# EAGLE board T02_noclock_rev3 (EAGLE 7.1.0)
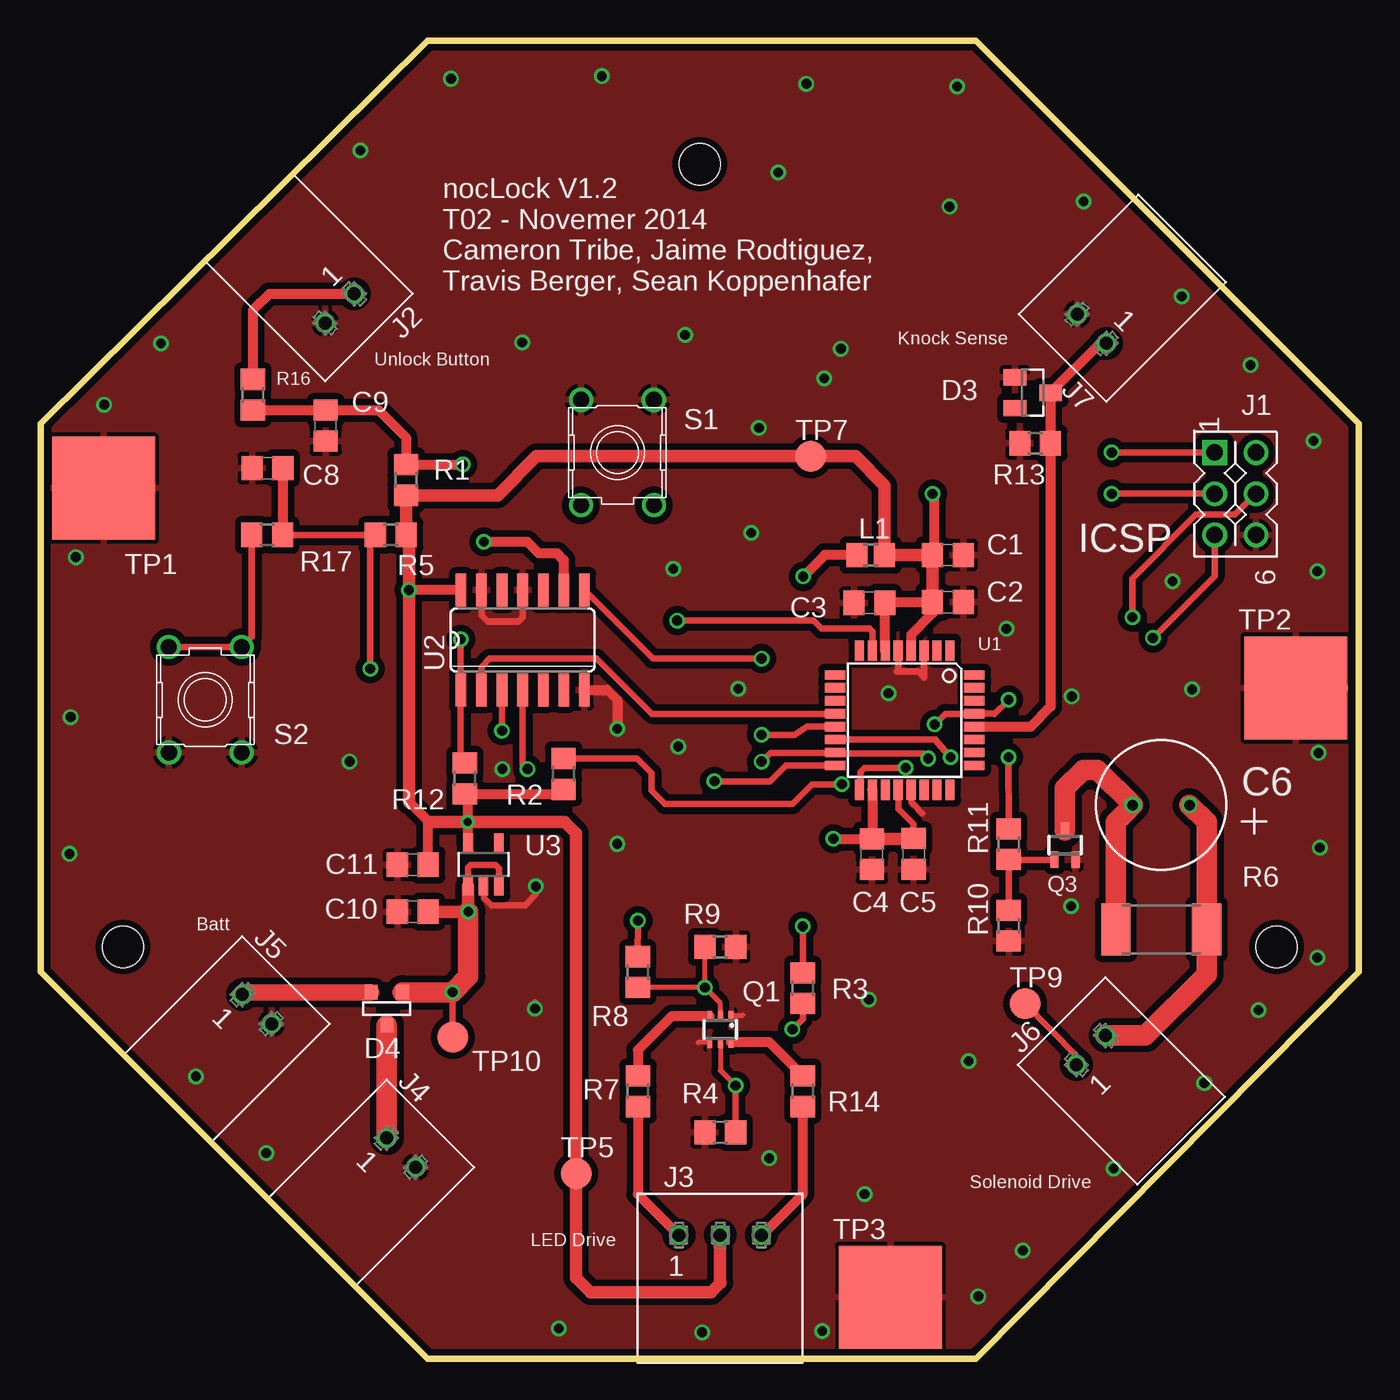
[diagram p0: board, top side]
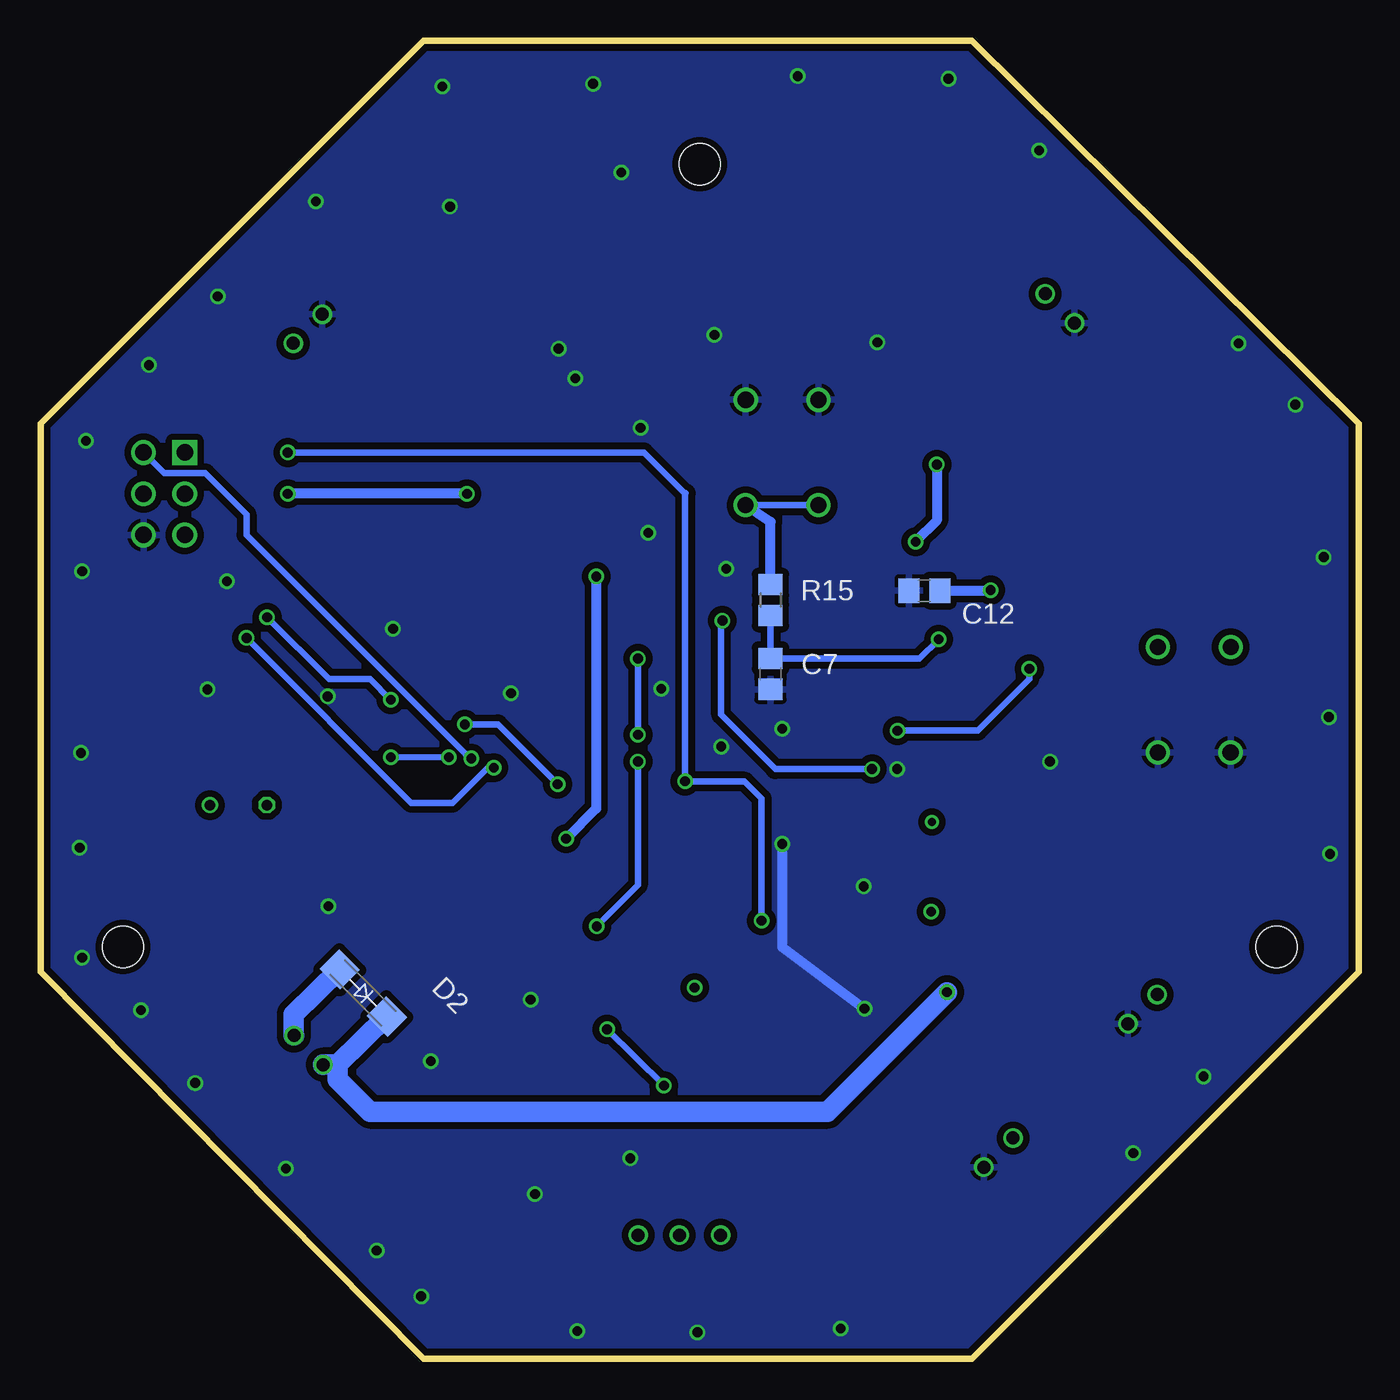
[diagram p1: board, bottom side, seen from below]

Size 81.28 x 81.28 mm. Coordinates in mm from the lower left corner, seen from the top.
Outline: 0,23.88 0,57.66 23.88,81.28 57.66,81.28 81.28,57.66 81.28,23.88 57.66,0 23.88,0 0,23.88
Copper layers (1*16): Top 0.0356mm / dielectric 1.5011mm / Bottom 0.0356mm
Design rules "OSH-Park-2-layer": minimum track width 6mil, minimum drill 13mil, track to track 6mil, track to pad 6mil, pad to pad 6mil, via to via 6mil, smd to smd 6mil, copper to edge 15mil, drill to drill 6mil, minimum pad ring 7mil, minimum via ring 7mil, stop-mask expansion 3mil, vias tented up to drill 0mil, thermal gap 10mil
Holes 2.54 mm at 76.2,25.4 5.08,25.4 40.64,73.66

## Footprints (pad centres in the part's own frame; a part is rotated, then mirrored left to right if it is on the bottom)
C0805 = smd 1.3 x 1.5: 1 -0.95,0; 2 0.95,0
EKY-100ELL102MH20D = drill 0.65: + -1.75,0 | drill 0.65 octagon: - 1.75,0
SMA-DO214AC = smd 1.8 x 1.7: A -2.05,0; K 2.05,0
SOT23 = smd 1 x 1.4: 1 -0.95,-1.1; 2 0.95,-1.1; 3 0,1.1
SOT-23 = smd 0.787 x 0.889: 1 -0.94,1.016; 2 0.991,1.016; 3 0.025,-1.016
ICSP = drill 1.016 square: 1 -5.08,1.27 | drill 1.016: 2 -2.54,1.27; 3 0,1.27; 4 -5.08,3.81; 5 -2.54,3.81; 6 0,3.81
2-PIN_CONNECTOR = drill 0.8: 1 -1.27,0; 2 1.27,0
3_PIN_CONNECTOR = drill 0.8: 1 -2.54,0; 2 0,0; 3 2.54,0
R0805 = smd 1.3 x 1.5: 1 -0.85,0; 2 0.85,0
SOT363 = smd 0.3 x 0.7: D1 -0.62,-0.8; D2 -1.92,0.8; G1 -1.27,0.8; G2 -1.27,-0.8; S1 -0.62,0.8; S2 -1.92,-0.8
SOT323 = smd 0.5 x 1: 1 0,0.9; 2 -0.65,-0.9; 3 0.65,-0.9
R0805' = smd 1.3 x 1.5: 1 -0.95,0; 2 0.95,0
R2512 = smd 1.8 x 3.2: 1 -2.8,0; 2 2.8,0
FSM14JH = drill 1: 1 -3.25,2.25 | drill 0.99: 2 -3.25,-2.25; 3 3.25,2.25; 4 3.25,-2.25
TP100SQ = smd 6.35 x 6.35: P$1 0,0
TP19R = smd 1.9 x 1.9: TP 0,0
TQFP32 = smd 1.27 x 0.559: 1 -4.293,2.8; 2 -4.293,2; 3 -4.293,1.2; 4 -4.293,0.4; 5 -4.293,-0.4; 6 -4.293,-1.2; 7 -4.293,-2; 8 -4.293,-2.8; 17 4.293,-2.8; 18 4.293,-2; 19 4.293,-1.2; 20 4.293,-0.4; 21 4.293,0.4; 22 4.293,1.2; 23 4.293,2; 24 4.293,2.8 | smd 0.559 x 1.27: 9 -2.8,-4.293; 10 -2,-4.293; 11 -1.2,-4.293; 12 -0.4,-4.293; 13 0.4,-4.293; 14 1.2,-4.293; 15 2,-4.293; 16 2.8,-4.293; 25 2.8,4.293; 26 2,4.293; 27 1.2,4.293; 28 0.4,4.293; 29 -0.4,4.293; 30 -1.2,4.293; 31 -2,4.293; 32 -2.8,4.293
SO14 = smd 0.66 x 2.032: 1 -3.81,-3.073; 2 -2.54,-3.073; 3 -1.27,-3.073; 4 0,-3.073; 5 1.27,-3.073; 6 2.54,-3.073; 7 3.81,-3.073; 8 3.81,3.073; 9 2.54,3.073; 10 1.27,3.073; 11 0,3.073; 12 -1.27,3.073; 13 -2.54,3.073; 14 -3.81,3.073
SOT23-5 = smd 0.6 x 1.2: 1 -0.95,-1.306; 2 0,-1.306; 3 0.95,-1.306; 4 0.95,1.306; 5 -0.95,1.306

## Placement (x,y rotation side)
C1  4.7uF  [C0805]  55.94,49.56 0 top
C2  0.1uF  [C0805]  55.94,46.66 0 top
C3  0.1uF  [C0805]  51.1,46.61 180 top
C4  0.1uF  [C0805]  51.25,31.12 270 top
C5  4.7uF  [C0805]  53.83,31.13 270 top
C6  1000uF  [EKY-100ELL102MH20D]  69.08,34.15 180 top
C7  1uF  [C0805]  36.28,42.24 270 bottom
C8  1uF  [C0805]  13.99,54.92 180 top
C9  1uF  [C0805]  17.57,57.54 270 top
C10  1uF  [C0805]  22.95,27.57 180 top
C11  1uF  [C0805]  22.95,30.46 180 top
C12  1uF  [C0805]  26.79,47.36 180 bottom
D2  GF1  [SMA-DO214AC]  61.38,22.56 315 bottom
D3  5.1V  [SOT23]  61.17,59.57 270 top
D4  PMEG2005CT,215  [SOT-23]  21.32,21.59 0 top
J1  ICSP  [ICSP]  71.12,50.8 270 top
J2  640455-2  [2-PIN_CONNECTOR]  18.44,64.77 225 top
J3  5BC-3-CA-F  [3_PIN_CONNECTOR]  41.9,7.63 0 top
J4  640455-2  [2-PIN_CONNECTOR]  22.23,12.73 315 top
J5  640455-2  [2-PIN_CONNECTOR]  13.34,21.56 315 top
J6  640455-2  [2-PIN_CONNECTOR]  64.76,19.04 45 top
J7  640455-2  [2-PIN_CONNECTOR]  64.81,63.51 135 top
L1  CE201210-10NJ  [R0805]  51.18,49.56 0 top
Q1  DMN63D8LDW-7  [SOT363]  40.64,20.32 180 top
Q3  DMG1012UW-7  [SOT323]  63.16,31.68 0 top
R1  10K  [R0805']  22.53,54.19 90 top
R2  10K  [R0805']  32.24,36.07 90 top
R3  1k  [R0805']  46.99,22.86 90 top
R4  10K  [R0805']  41.91,13.97 0 top
R5  10k  [R0805']  21.59,50.8 180 top
R6  10  [R2512]  69.09,26.49 0 top
R7  330  [R0805']  36.83,16.51 270 top
R8  1k  [R0805']  36.82,23.85 90 top
R9  10K  [R0805']  41.91,25.4 180 top
R10  10k  [R0805']  59.69,26.71 90 top
R11  1k  [R0805']  59.68,31.73 90 top
R12  10k  [R0805']  26.16,35.79 90 top
R13  1M  [R0805']  61.32,56.45 180 top
R14  220  [R0805']  46.99,16.51 270 top
R15  100  [R0805']  36.28,46.79 270 bottom
R16  100  [R0805']  13.1,59.44 270 top
R17  100  [R0805']  13.97,50.8 0 top
S1  2-1825910-7  [FSM14JH]  35.56,55.88 270 top
S2  2-1825910-7  [FSM14JH]  10.16,40.64 90 top
TP1  TP  [TP100SQ]  3.89,53.68 0 top
TP2  TP  [TP100SQ]  77.39,41.38 0 top
TP3  TP  [TP100SQ]  52.39,3.8 0 top
TP5  TPTP19R  [TP19R]  33.02,11.43 0 top
TP7  TPTP19R  [TP19R]  47.48,55.65 0 top
TP9  TPTP19R  [TP19R]  60.69,21.91 0 top
TP10  TPTP19R  [TP19R]  25.43,19.85 0 top
U1  ATMEGA88A  [TQFP32]  53.27,39.38 270 top
U2  4584D  [SO14]  29.72,44.32 0 top
U3  MCP1802  [SOT23-5]  27.3,30.48 0 top

## Library data of the parts
C1 C5 = rcl; PARTNUM: CL21A475KOFNNNE
C2-C4 = rcl; PARTNUM: GRM155R61A104KA01D
C6 J1 L1 S1 = nocLock_temp
C7-C12 = rcl; PARTNUM: CL21B105KBFNNNE
D2 = diode; PARTNUM: S1J
D3 = diode; PARTNUM: BZX84C4V7-TP
D4 = nocLock_temp; PARTNUM: PMEG2005CT,215
J2-J7 S2 U1 = T02_nocLock
Q1 = nocLock_temp_Rev2; PARTNUM: DMN63D8LDW-7
Q3 = nocLock_temp; PARTNUM: DMG1012UW-7
R1 R2 R4 R5 R9 R10 R12 R15-R17 = rcl; PARTNUM: ESR10EZPJ103
R3 R8 R11 = rcl; PARTNUM: MCR10ERTF1001
R6 = rcl; PARTNUM: CRM2512-JW-100ELF
R7 = rcl; PARTNUM: MCR10ERTF3300
R13 = rcl; PARTNUM: RMCF0805JT1M00
R14 = rcl; PARTNUM: RMCF0805FT220R
TP1-TP3 TP5 TP7 TP9 TP10 = testpad
U2 = 45xx; PARTNUM: 4584D
U3 = nocLock_temp; PARTNUM: MCP1802

## Nets
9V: D4.3 J4.1
+5V: C1.1 C2.1 C3.1 C11.1 C12.1 J1.2 J3.2 L1.2 R1.1 R2.1 R5.1 R12.1 TP5.TP TP7.TP U1.4 U1.6 U2.14 U3.5
+9V: C10.1 D2.K D4.2 J6.1 TP9.TP TP10.TP U3.1 U3.3
AVCC: C4.1 C5.1 L1.1 U1.18 U1.20
BATT: D4.1 J5.1
GND: C1.2 C2.2 C3.2 C4.2 C5.2 C7.2 C8.2 C9.2 C10.2 C11.2 C12.2 D3.1 J1.6 J2.2 J4.2 J5.2 J7.2 Q1.S1 Q1.S2 Q3.3 R4.1 R9.1 R10.1 R13.2 S1.1 S1.2 S2.1 S2.2 TP1.P$1 TP2.P$1 TP3.P$1 U1.3 U1.5 U1.21 U2.7 U2.11 U2.13 U3.2
KNOCK_SENSE: D3.3 J7.1 R13.1 U1.28
MISO: J1.1 R8.2 U1.16
MOSI: J1.4 R3.2 U1.15
N$1: Q1.D1 R7.1
N$2: Q1.G2 R8.1 R9.2
N$3: C9.1 R1.2 R16.2 U2.9
N$4: U1.7 U2.4
N$5: J3.1 R7.2
N$6: J3.3 R14.2
N$7: R15.1 S1.3 S1.4
N$8: Q1.D2 R14.1
N$9: Q3.2 R10.2 R11.1
N$10: C6.+ D2.A J6.2 R6.2
N$11: C6.- Q3.1 R6.1
N$14: R17.1 S2.3 S2.4
N$16: C8.1 R5.2 R17.2 U2.3
N$17: J2.1 R16.1
N$19: C7.1 R12.2 R15.2 U2.1
N$21: Q1.G1 R3.1 R4.2
PROGRAM: U1.12 U2.2
RESET: J1.5 R2.2 U1.29
SCK: J1.3 U1.17
SOLENOID_CONTROL: R11.2 U1.14
UNLOCK: U1.13 U2.8

## Tracks (layer width: path | path; a pad name or v marks a point on that pad's centre or on a via)
9V
  Top 0.61: J4.1 21.34,13.62 21.35,13.62
  Top 1.27: D4.3 21.35,13.62
+5V  (via drill 0.5, 0.6)
  Top 0.406: L1.2 52.13,49.56 | J1.2 v66.04,53.34 | 26.36,34.3 R12.1 | 31.75,33.14 31.73,33.12
  Top 0.61: U3.5 26.36,33.08 v26.33,33.11 | 26.35,34.29 R12.1 | 33.01,10.95 33.01,10.94 | v26.33,33.11 v26.34,33.1 26.36,33.1 26.37,33.12 26.37,34.31 R12.1 | L1.2 | v55,53.35 v54.99,53.34 55.08,53.25 55.08,49.67 54.99,49.58 C1.1 54.88,49.45 | 22.72,35.63 22.71,35.64 | 22.71,50.63 R5.1 | U2.14 v22.72,47.4 v22.71,47.4 | 22.71,50.63 R5.1 | 22.72,34.34 23.95,33.11 23.9,33.06 C11.1 | v26.33,33.11 | R5.1 | R2.1 31.93,34.81 26.52,34.81 26.49,34.84 R12.1 | C2.1 54.95,46.7 | L1.2 52.14,49.45 | 52.16,46.53 52.07,46.62 52.06,46.62 C3.1 | 52.07,49.44 52.06,49.45 52.06,49.53 L1.2 | 54.98,46.53 54.98,46.25 | C3.1 52.08,46.58 52.16,46.66 C2.1 | U1.4 53.67,44.66 54.99,45.97 C2.1 | U1.6 52.05,43.7 C3.1
  Top 0.762: TP5.TP 33.01,10.94 33.01,5.01 33.92,4.1 41.33,4.1 41.91,4.68 41.9,4.7 J3.2 | 26.37,33.12 31.73,33.12 32.3,33.12 33.01,32.41 33.01,10.95 | v22.71,47.4 22.71,50.63 | v22.72,47.4 22.72,35.63 22.72,34.34 | 23.95,33.11 v26.33,33.11 | R5.1 R1.1 28.18,53.24 30.58,55.65 TP7.TP 50.23,55.65 52.03,53.85 52.03,53.84 L1.2 | 52.14,49.45 52.25,49.56 C1.1 | 54.88,49.45 54.99,49.34 C2.1 54.99,46.55 54.98,46.53
  Bottom 0.61: v54.99,53.34 v66.04,53.34 | v66.04,53.34 | C12.1 22.75,47.36 v22.71,47.4
+9V  (via drill 0.6)
  Top 0.406: v25.4,22.61 25.4,20.32 TP10.TP | TP9.TP 63.87,18.68 63.86,18.66 J6.1 | U3.3 28.25,30.25 28.04,30.46 26.5,30.46 26.36,30.32 U3.1 | U3.1
  Top 0.762: C10.1 v26.36,27.57 26.36,27.58 U3.1
  Top 1.27: D4.2 v25.4,22.61 26.36,23.57 v26.36,27.57
  Bottom 1.27: v25.4,22.61 32.77,15.24 60.96,15.24 62.97,17.25 62.97,18.15 | 62.97,18.15 D2.K | 62.97,18.15 63.85,18.15 J6.1
AVCC  (via drill 0.6)
  Top 0.406: U1.20 52.88,33.92 53.82,32.97 C5.1
  Top 0.61: L1.1 48.35,49.56 v47.02,48.24 | C5.1 | U1.18 51.31,35.05 51.31,32.12 C4.1 v48.88,32.07
  Top 0.762: C4.1 53.82,32.07 C5.1
  Bottom 0.61: v47.02,48.24 47.02,33.93 v48.88,32.07
BATT
  Top 0.61: J5.1 12.44,22.49 12.55,22.61
  Top 1.016: 12.55,22.61 D4.1
GND  (via drill 0.6)
  Top 0.305: Q1.S1 41.25,19.51 40.54,19.51 | Q1.S2 42.63,21.19 43.3,21.19
  Top 0.406: 43.18,25.08 R9.1 | U2.13 27.18,45.85 27.56,45.47 29.46,45.47 29.72,45.72 U2.11 | v30.48,21.59 30.48,21.98 | U1.5 52.88,42.47 52.79,42.38 54.11,42.38 54.47,42.02 U1.3 | U3.2 27.34,29.14 27.34,28.43 27.81,27.96 29.87,27.96 30.53,28.62 v30.53,29.14 | U1.21 53.67,34.32 54.38,33.62
  Top 0.61: U2.7 34.95,41.25 35.56,40.64 v35.56,38.85
  Bottom 0.61: v35.56,31.75 35.56,25.4 v30.48,21.59
  other vias: 49.34,62.29 56.51,78.45 74.6,61.28 59.55,45.01 39,48.71 43.01,41.32 39.32,37.75 50.8,10.16 78.71,24.74 3.92,58.83 29.69,62.67 19.05,36.83 47.21,78.61 64.31,71.36 34.61,79.08 25.31,78.93 19.71,74.51 7.42,62.6 2.17,49.43 1.86,39.57 1.78,31.14 9.58,17.41 13.91,12.68 39.73,63.14 48.31,60.45 31.96,1.88 40.78,1.64 48.19,1.72 57.81,3.86 60.56,6.69 66.15,11.74 71.75,17.02 75.09,21.51 78.87,31.53 78.79,37.36 70.99,41.27 78.71,48.56 78.48,56.6 70.36,65.51 56.03,71.04 44.29,57.4 43.82,50.93 52.27,41.03 57.22,18.37 63.54,27.92 51.07,22.15 44.92,12.37 45.48,73.15 69.8,47.95 28.46,36.37 63.58,40.84
  pour Bottom (isolate 0.406): 0,24.13 0,57.53 23.88,81.28 57.53,81.28 81.15,57.66 81.28,24.13 57.53,0.13 23.88,0
  pour Top (isolate 0.406): 0,24.13 -0.13,57.66 23.75,81.28 57.53,81.28 81.15,57.66 81.28,23.75 57.66,0.25 23.75,0.13 -0.13,24
KNOCK_SENSE
  Top 0.406: 61.02,38.98 61.03,38.97
  Top 0.61: 61.03,38.97 62.27,40.22 R13.1 D3.3 65.23,62.53 65.31,62.6 65.32,62.62 J7.1 | U1.28 61.02,38.98
MISO  (via drill 0.6)
  Top 0.406: J1.1 v66.04,55.88 | U1.16 45.97,36.58 44.98,35.59 41.57,35.59 v41.55,35.62 | R8.2 v36.83,27.02
  Bottom 0.406: v36.83,27.02 36.83,34.55 37.87,35.59 41.52,35.59 v41.55,35.62 41.55,53.34 | 41.52,53.37 41.55,53.34 | 41.55,53.34 44.09,55.88 v66.04,55.88
MOSI  (via drill 0.6)
  Top 0.406: v44.45,36.83 44.99,37.37 U1.15 49.04,37.38 49.08,37.34 54.4,37.34 v54.72,37.02 | v46.99,26.67 R3.2
  Bottom 0.406: J1.4 73.66,54.61 71.12,54.61 68.58,52.07 68.58,50.8 55.12,37.34 v54.72,37.02 | v44.45,36.83 44.45,29.21 v46.99,26.67
N$1
  Top 0.61: Q1.D1 38.9,21.12 36.83,19.05 R7.1
N$2  (via drill 0.6)
  Top 0.305: Q1.G2 41.91,21.95 v40.96,22.9 | v40.96,22.9 R9.2 | v40.96,22.9 R8.1
N$3  (via drill 0.6)
  Top 0.406: 32.38,47.52 U2.9
  Top 0.61: R16.2 C9.1 20.85,58.49 22.53,56.81 R1.2 v26.02,55.14 | v27.33,50.38 30,50.38 30.71,49.67 31.85,49.67 32.26,49.26 U2.9
  Bottom 0.61: v26.02,55.14 26.02,51.69 v27.33,50.38
N$4  (via drill 0.6)
  Top 0.406: U2.4 29.72,36.67 v30.02,36.37 | v39.24,45.52 47.64,45.52 48.15,45.02 51.09,45.02 51.27,44.84 U1.7
  Bottom 0.406: v30.02,36.37 35.97,36.37 39.32,39.72 39.32,45.44 v39.24,45.52
N$5
  Top 0.61: R7.2 36.83,10.16 J3.1
N$6
  Top 0.61: R14.2 46.99,10.16 44.46,7.63 J3.3
N$7
  Bottom 0.406: S1.3 S1.4 | R15.1
  Bottom 0.61: R15.1 36.27,51.6 S1.3
N$8
  Top 0.61: R14.1 44.93,19.52 Q1.D2
N$9
  Top 0.406: R10.2 R11.1 59.69,30.78 Q3.2
N$10
  Top 1.27: C6.+ 71.89,33.1 R6.2 71.89,23.72 68.11,19.95 J6.2
  Bottom 1.27: D2.A 65.67,21.25 J6.2
N$11
  Top 1.27: R6.1 66.29,33.11 C6.- 65.16,36.32 64.29,36.32 63.16,35.2 Q3.1
N$14
  Top 0.406: R17.1 13.02,44.5 S2.4 S2.3
N$16  (via drill 0.6)
  Top 0.406: R17.2 R5.2 20.32,50.48 v20.32,42.55 | U2.3 v28.45,38.73
  Top 0.61: C8.1 14.92,54.9 R17.2
  Bottom 0.406: v28.45,38.73 23.5,38.73 20.32,41.91 v20.32,42.55
N$17
  Top 0.61: R16.1 13.09,60.4 13.09,64.65 14.11,65.67 J2.1
N$19  (via drill 0.6)
  Top 0.406: R12.2 25.91,37.27 U2.1 v25.9,44.37
  Bottom 0.406: R15.2 C7.1 27.08,43.19 v25.9,44.37
N$21  (via drill 0.6)
  Top 0.305: Q1.G1 41.91,17.78 42.84,16.86
  Top 0.406: R4.2 43.18,14.29 42.85,14.62 v42.85,16.86 42.84,16.86 | R3.1 46.99,20.95 v46.35,20.32
  Bottom 0.406: v46.35,20.32 v42.85,16.86
PROGRAM
  Top 0.406: U1.12 37.7,39.77 34.29,43.18 27.69,43.18 27.18,42.66 U2.2
RESET  (via drill 0.6)
  Top 0.406: v59.69,40.64 58.82,39.77 58.81,39.78 U1.29 57.56,39.77 55.77,39.77 v55.12,39.12 | R2.2 36.77,37.02 37.67,36.12 37.67,35.04 38.49,34.21 46.34,34.21 47.55,35.42 v49.39,35.42 v49.4,35.43 | J1.5 73.64,52.05 71.23,52.05 67.31,48.12 v67.31,45.72
  Bottom 0.406: v59.69,40.64 60.96,41.91 63.5,41.91 v67.31,45.72 | v55.12,39.12 53.09,39.12 v49.4,35.43
SCK  (via drill 0.6)
  Top 0.406: J1.3 72.39,48.26 v68.58,44.45 | v53.34,36.45 50.8,36.45 50.54,36.19 50.54,35.15 U1.17
  Bottom 0.406: v68.58,44.45 58.42,34.29 55.88,34.29 53.72,36.45 v53.34,36.45
SOLENOID_CONTROL  (via drill 0.6)
  Top 0.406: v56.1,37.09 55.17,38.17 55.17,38.18 U1.14 | v59.68,37.1 R11.2
  Bottom 0.406: v56.1,37.09 v59.68,37.1
UNLOCK  (via drill 0.6)
  Top 0.406: v44.45,38.48 46.48,38.48 47.24,38.99 U1.13 | U2.8 37.75,43.17 38.79,43.17 38.8,43.18 v44.45,43.18
  Bottom 0.406: v44.45,43.18 v44.45,38.48

## Text on the board
tPlace: nocLock V1.2 / T02 - Novemer 2014 / Cameron Tribe, Jaime Rodtiguez, / Travis Berger, Sean Koppenhafer | Knock Sense | Unlock Button | ICSP | Batt | Solenoid Drive | LED Drive | /Users/camerontribe/Desktop/School/14-15/FA2014/ECE 411/gitrepo/ECE411-Project/411 Project/nocLock/Graphics/Logo/KnockLockLogo.bmp